# Altium PCB evacc_v3_1.PcbDoc (part 2 of 5)
Units mm, origin at the board's own origin, x right, y up, seen from the top; angles counter-clockwise.
Board outline 160 x 215 mm, 2 copper layers (Top Layer, Bottom Layer), stack 1.671 mm thick; 227 components, 143 nets, 622 pads, 320 vias.
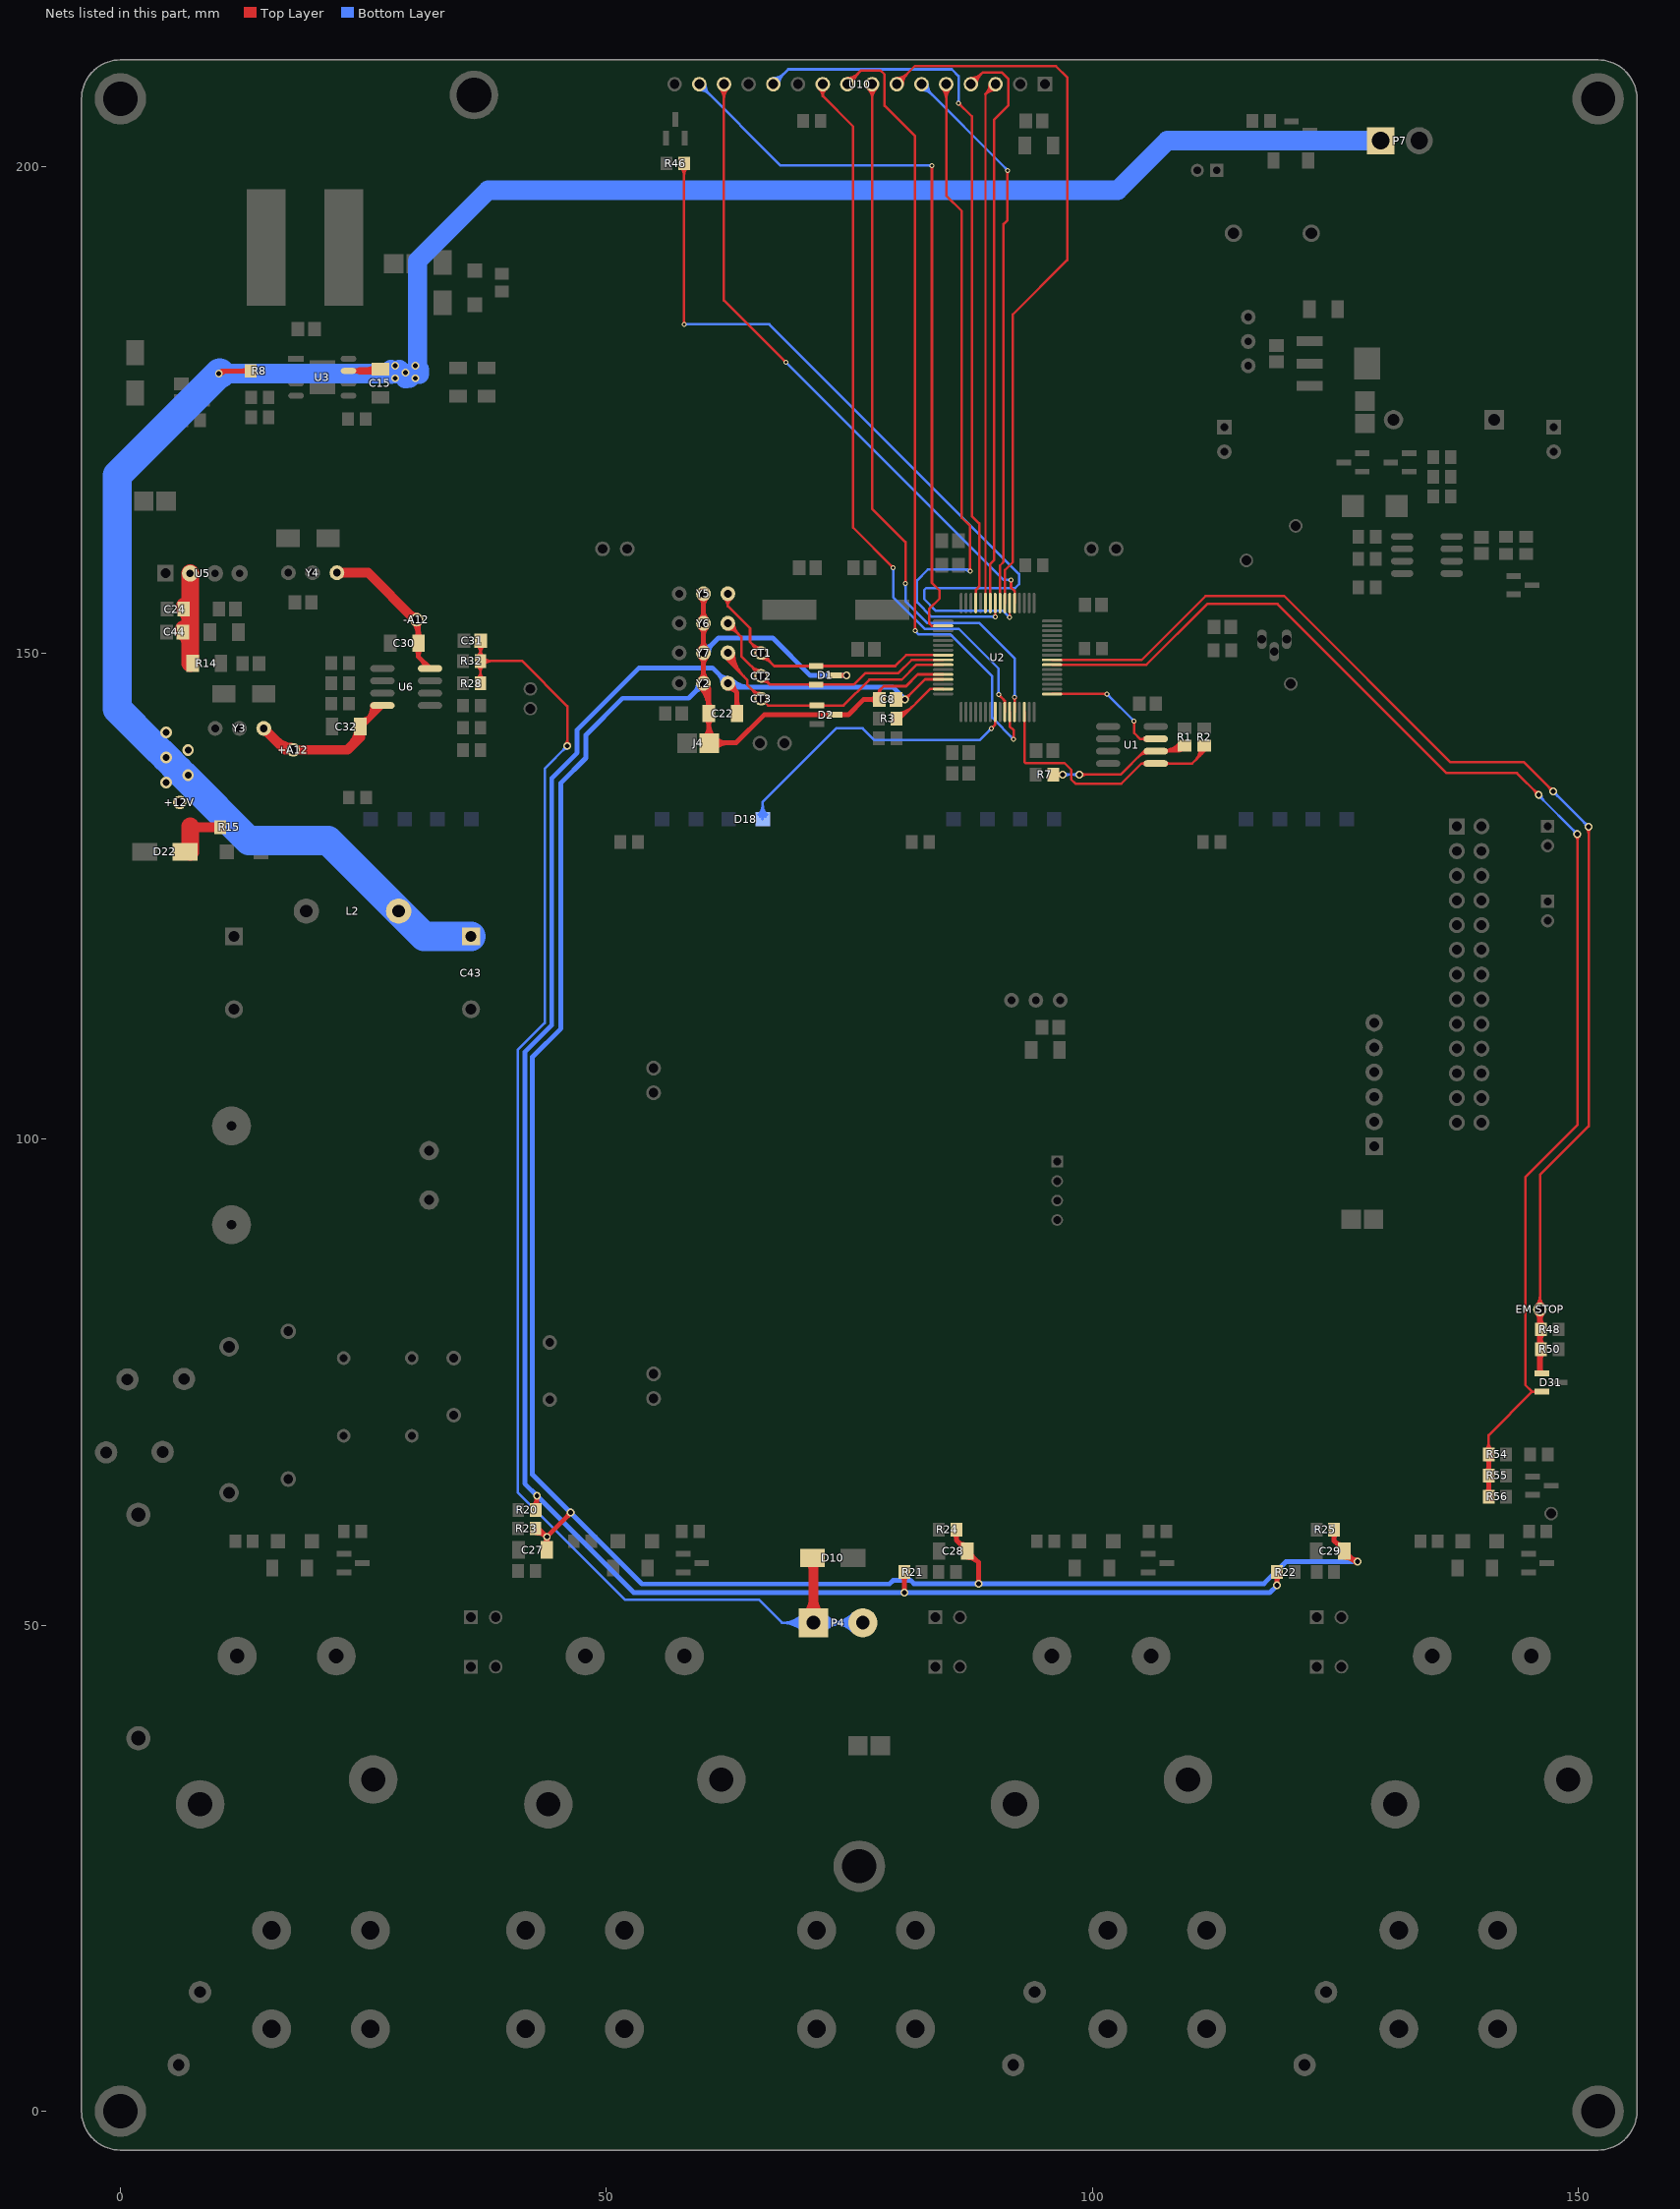
[diagram p2: the nets of this part, all layers, seen from the top]

## Via types
v1: diameter 0.8, hole 0.5, Top Layer to Bottom Layer, 150 vias
v2: diameter 0.8, hole 0.6, Top Layer to Bottom Layer, 80 vias
v3: diameter 0.5, hole 0.3, Top Layer to Bottom Layer, 53 vias
v4: diameter 1.27, hole 0.711, Top Layer to Bottom Layer, 20 vias
v5: diameter 1.2, hole 0.7, Top Layer to Bottom Layer, 13 vias
v6: diameter 1.2, hole 0.8, Top Layer to Bottom Layer, 4 vias

## Nets (pads, with @x,y where several pads share a name; then routed paths per layer and width w, separated by ;. In a path a pad name is that pad's centre, name@x,y a point inside that pad or via, vN(x,y) a via of type N, cw(c..) or ccw(c..) an arc to the next point about the centre after c; other vN are vias at no path point) (continued)
+12V: +12V.1 C15.1 C24.1 C43.1 C44.2 D22.2 L2.2 P7.1 R8.2 R14.1 R15.1 U3.7 U5.2 | length 287.7
  Top Layer w0.5: v1(10.135,178.74) 10.402,179.007 R8.2@13.388,179.007 ; 12.543,179.007 cw(c12.543,178.162) 13.14,178.759 ccw(c12.543,178.162) 12.543,179.007 ; 12.543,179.007 ccw(c12.543,179.852) 13.14,179.254 cw(c12.543,179.852) 12.543,179.007 ; v1@10.241,178.634 cw(c11.142,177.733) 11.142,179.007 ccw(c11.142,177.733) v1@10.241,178.634
  Top Layer w0.6: U3.7@23.465,179.014 24.633,179.014
  Top Layer w0.8: 24.633,179.014 26.561,179.014 C15.1@26.734,179.187 ; 25.463,179.014 ccw(c25.463,180.208) 26.307,179.364 cw(c25.463,180.208) 25.463,179.014
  Top Layer w1: 7.176,132.182 7.278,132.08 R15.1@10.276,132.08
  Top Layer w1.8: D22.2@7.176,129.515 7.176,129.54 7.176,132.182 ; R14.1@7.176,148.92 7.176,152.146 7.176,154.51 U5.2@7.176,158.193 ; C44.2@6.536,152.376 cw(c6.124,151.408) 7.176,151.408 ccw(c6.124,151.408) C44.2@6.536,152.376 ; C44.2@6.538,152.475 cw(c6.114,151.501) 7.176,151.501 ccw(c6.114,151.501) C44.2@6.538,152.475 ; C24.1@6.61,154.735 cw(c6.178,153.836) 7.176,153.836 ccw(c6.178,153.836) C24.1@6.61,154.735 ; C24.1@6.612,154.834 cw(c6.167,153.929) 7.176,153.929 ccw(c6.167,153.929) C24.1@6.612,154.834 ; C44.2@6.615,152.069 ccw(c5.26,153.424) 7.176,153.424 cw(c5.26,153.424) C44.2@6.615,152.069 ; C44.2@6.615,152.223 cw(c5.26,150.868) 7.176,150.868 ccw(c5.26,150.868) C44.2@6.615,152.223 ; C24.1@6.679,154.433 ccw(c5.478,155.634) 7.176,155.634 cw(c5.478,155.634) C24.1@6.679,154.433 ; C24.1@6.679,154.587 cw(c5.478,153.386) 7.176,153.386 ccw(c5.478,153.386) C24.1@6.679,154.587
  Bottom Layer w2: v1@10.296,178.731 28.27,178.731 29.312,178.731 29.972,178.731 30.558,179.317 30.558,179.553 30.558,190.315 37.829,197.587 37.922,197.587 102.591,197.587 107.696,202.692 P7.1@129.644,202.692 ; 27.846,179.128 ccw(c28.805,180.088) 28.805,178.731 ; 27.846,179.128 ccw(c28.805,180.088) 28.805,178.731 ; 27.846,179.128 ccw(c28.805,180.088) 28.805,178.731 ; 27.846,179.128 ccw(c28.805,180.088) 28.805,178.731 ; 27.846,179.128 ccw(c28.805,180.088) 28.805,178.731 ; 27.846,179.128 ccw(c28.805,180.088) 28.805,178.731 ; 29.312,178.216 ccw(c29.312,178.567) 29.56,178.319 ; 29.312,178.216 ccw(c29.312,178.567) 29.56,178.319 ; 29.312,178.216 ccw(c29.312,178.567) 29.56,178.319 ; 29.312,178.216 ccw(c29.312,178.567) 29.56,178.319 ; 29.818,178.731 ccw(c29.818,180.088) 30.777,179.128 ; 29.818,178.731 ccw(c29.818,180.088) 30.777,179.128 ; 29.818,178.731 ccw(c29.818,180.088) 30.777,179.128 ; 29.818,178.731 ccw(c29.818,180.088) 30.777,179.128 ; 29.818,178.731 ccw(c29.818,180.088) 30.777,179.128 ; 29.818,178.731 ccw(c29.818,180.088) 30.777,179.128 ; 27.735,178.731 ccw(c27.735,180.088) 28.694,179.128 cw(c27.735,180.088) 27.735,178.731 ; 27.846,178.681 cw(c27.965,178.562) 27.965,178.731 ccw(c27.965,178.562) 27.846,178.681 ; 28.575,178.731 cw(c28.575,178.562) 28.694,178.681 ccw(c28.575,178.562) 28.575,178.731 ; 29.753,178.257 cw(c30.368,178.257) 29.933,178.692 ccw(c30.368,178.257) 29.753,178.257 ; 30.658,178.731 cw(c30.658,178.562) 30.777,178.681 ccw(c30.658,178.562) 30.658,178.731
  Bottom Layer w3: v1@10.296,178.731 10.211,178.816 v1(10.135,178.74) -0.33,168.275 -0.33,144.247 3.404,140.513 4.686,139.23 5.969,137.947 6.718,137.198 13.208,130.708 21.362,130.708 L2.2@28.626,123.444 31.226,120.844 C43.1@36.068,120.844
  other v1: 28.27,178.257 30.353,178.257 29.312,178.816 28.27,179.553 30.353,179.553
  other v5: 4.699,136.677 6.96,137.439 4.699,139.243 6.96,140.005 4.699,141.808
+A3V3: C8.1 C22.1 R20.2 R21.2 R22.2 U2.13 Y2.3 | length 247.9
  Top Layer w0.254: R21.2@80.634,55.45 80.634,54.407 ; 80.645,54.396 80.634,54.407 ; 80.634,54.407 cw(c81.337,54.407) 80.917,54.971 ccw(c81.337,54.407) 80.634,54.407 ; 80.634,54.407 ccw(c79.931,54.407) 80.351,54.971 cw(c79.931,54.407) 80.634,54.407
  Top Layer w0.3: C8.1@79.781,145.225 v1(80.709,145.225) ; U2.13@84.634,147.282 82.766,147.282 v1(80.709,145.225) ; C8.1@80.105,145.225 cw(c80.105,144.621) 80.532,145.048 ccw(c80.105,144.621) C8.1@80.105,145.225 ; C8.1@80.105,145.225 ccw(c80.105,145.829) 80.532,145.402 cw(c80.105,145.829) C8.1@80.105,145.225 ; v1(80.709,145.225) cw(c80.709,145.836) 80.199,145.5 ccw(c80.709,145.836) v1(80.709,145.225) ; v1(80.709,145.225) ccw(c80.709,144.614) 80.199,144.95 cw(c80.709,144.614) v1(80.709,145.225) ; 81.136,145.652 cw(c80.709,146.079) 80.709,145.475 ccw(c80.709,146.079) 81.136,145.652 ; 81.136,145.652 ccw(c81.563,145.225) 80.959,145.225 cw(c81.563,145.225) 81.136,145.652
  Top Layer w0.5: R20.2@42.734,61.849 42.85,61.965 v1(42.85,63.297) ; Y2.3@62.483,146.876 63.426,145.933 C22.1@63.426,143.764 ; R21.2@80.634,55.45 80.645,55.439 80.645,54.396 v1(80.645,53.34) ; v1(118.988,54.091) R22.2@118.988,55.45 ; 63.357,146.002 cw(c64.231,146.876) 62.995,146.876 ccw(c64.231,146.876) 63.357,146.002 ; 63.357,146.002 ccw(c62.483,145.128) 62.483,146.364 cw(c62.483,145.128) 63.357,146.002 ; 63.426,144.98 cw(c62.46,144.98) 63.143,144.297 ccw(c62.46,144.98) 63.426,144.98 ; 63.426,144.98 ccw(c64.392,144.98) 63.709,144.297 cw(c64.392,144.98) 63.426,144.98 ; 118.988,54.505 cw(c119.833,54.505) 119.235,55.102 ccw(c119.833,54.505) 118.988,54.505 ; 118.988,54.505 ccw(c118.143,54.505) 118.74,55.102 cw(c118.143,54.505) 118.988,54.505 ; R20.2@42.486,62.196 ccw(c41.609,63.074) 42.85,63.074 cw(c41.609,63.074) R20.2@42.486,62.196 ; R21.2@80.386,55.102 cw(c79.762,54.478) 80.645,54.478 ccw(c79.762,54.478) R21.2@80.386,55.102 ; 80.645,54.532 cw(c81.452,54.532) 80.881,55.102 ccw(c81.452,54.532) 80.645,54.532
  Bottom Layer w0.5: v1@42.799,63.246 v1(42.85,63.297) ; v1(80.645,53.34) 52.807,53.34 v1(42.85,63.297) ; v1(80.709,145.225) 79.446,146.487 62.871,146.487 Y2.3@62.483,146.876 60.896,148.463 53.365,148.463 46.99,142.088 46.99,139.725 44.368,137.103 44.368,111.703 41.605,108.941 41.605,64.541 v1(42.85,63.297) ; v1@80.899,53.34 118.237,53.34 v1(118.988,54.091) ; 61.609,147.75 cw(c60.735,146.876) 61.971,146.876 ccw(c60.735,146.876) 61.609,147.75 ; 61.609,147.75 ccw(c62.483,148.624) 62.483,147.388 cw(c62.483,148.624) 61.609,147.75 ; Y2.3@62.491,146.884 ccw(c63.45,147.843) 63.45,146.487 cw(c63.45,147.843) Y2.3@62.491,146.884 ; Y2.3@62.845,147.238 ccw(c64.657,149.05) 64.657,146.487 cw(c64.657,149.05) Y2.3@62.845,147.238
+A12V: +A12.1 C32.2 U6.8 Y3.3 | length 30.9
  Top Layer w0.6: C32.2@24.666,142.418 24.779,142.418 U6.8@26.95,144.589 ; C32.2@24.666,143.018 ccw(c24.666,144.74) 25.883,143.522 cw(c24.666,144.74) C32.2@24.666,143.018 ; 25.328,142.967 ccw(c23.707,144.589) 26,144.589 cw(c23.707,144.589) 25.328,142.967 ; 26.353,143.992 ccw(c25.755,144.589) 26.6,144.589 cw(c25.755,144.589) 26.353,143.992
  Top Layer w1: Y3.3@14.743,142.24 16.953,140.03 +A12.1@17.78,140.03 23.368,140.03 24.666,141.328 C32.2@24.666,142.418 ; 16.026,140.957 ccw(c17.78,142.711) 17.78,140.23 cw(c17.78,142.711) 16.026,140.957 ; 23.816,140.478 ccw(c22.125,142.168) 24.516,142.168 cw(c22.125,142.168) 23.816,140.478
-A12V: -A12.1 C30.1 U6.4 Y4.1 | length 42.9
  Top Layer w0.254: C30.1@30.48,151.183 -A12.1@30.48,153.236 ; 30.48,152.033 cw(c31.863,152.033) 30.885,153.011 ccw(c31.863,152.033) 30.48,152.033 ; 30.48,152.033 ccw(c29.097,152.033) 30.075,153.011 cw(c29.097,152.033) 30.48,152.033 ; 30.48,152.646 cw(c31.25,152.646) 30.706,153.19 ccw(c31.25,152.646) 30.48,152.646 ; 30.48,152.646 ccw(c29.71,152.646) 30.254,153.19 cw(c29.71,152.646) 30.48,152.646 ; C30.1@30.29,151.623 ccw(c29.832,152.081) 30.48,152.081 cw(c29.832,152.081) C30.1@30.29,151.623 ; 30.48,152.337 ccw(c31.744,152.337) 30.85,151.443 cw(c31.744,152.337) 30.48,152.337 ; -A12.1@30.48,152.95 ccw(c32.357,152.95) 31.03,151.623 cw(c32.357,152.95) -A12.1@30.48,152.95
  Top Layer w0.5: Y4.1@22.272,158.242 Y4.1@22.606,158.242 ; C30.1@30.48,151.183 C30.1@30.66,151.003 ; -A12.1@30.48,153.236 30.66,153.236 C30.1@30.66,151.003 ; U6.4@31.85,148.399 30.66,149.589 C30.1@30.66,151.003 ; 30.66,149.787 cw(c31.626,149.787) 30.943,150.47 ccw(c31.626,149.787) 30.66,149.787 ; 30.66,149.787 ccw(c29.694,149.787) 30.377,150.47 cw(c29.694,149.787) 30.66,149.787 ; 30.66,152.219 cw(c29.694,152.219) 30.377,151.536 ccw(c29.694,152.219) 30.66,152.219 ; 30.66,152.219 ccw(c31.626,152.219) 30.943,151.536 cw(c31.626,152.219) 30.66,152.219 ; -A12.1@30.162,153.098 cw(c28.959,151.895) 30.66,151.895 ccw(c28.959,151.895) -A12.1@30.162,153.098 ; 31.018,149.231 cw(c30.215,148.428) 31.35,148.383 ccw(c30.215,148.428) 31.018,149.231 ; U6.4@31.826,148.423 cw(c31.769,148.367) 31.849,148.363 ccw(c31.769,148.367) U6.4@31.826,148.423
  Top Layer w1: Y4.1@22.606,158.242 25.474,158.242 30.3,153.416 -A12.1@30.48,153.416 ; 29.831,153.885 ccw(c30.48,154.533) 30.48,153.616 cw(c30.48,154.533) 29.831,153.885
/BLA: R46.1 U2.54 | length 92.2
  Top Layer w0.201: v3(91.484,153.646) U2.54@91.484,155.132 ; 91.484,154.007 cw(c91.123,154.007) 91.378,153.752 ccw(c91.123,154.007) 91.484,154.007 ; 91.484,154.007 ccw(c91.845,154.007) 91.59,153.752 cw(c91.845,154.007) 91.484,154.007
  Top Layer w0.254: v3(57.987,183.796) R46.1@57.987,200.357 ; 57.987,184.093 cw(c57.69,184.093) 57.9,183.883 ccw(c57.69,184.093) 57.987,184.093 ; 57.987,184.093 ccw(c58.284,184.093) 58.074,183.883 cw(c58.284,184.093) 57.987,184.093 ; 57.987,199.115 cw(c59.129,199.115) 58.321,199.923 ccw(c59.129,199.115) 57.987,199.115 ; 57.987,199.115 ccw(c56.845,199.115) 57.653,199.923 cw(c56.845,199.115) 57.987,199.115
  Bottom Layer w0.254: v3(57.987,183.796) 66.749,183.796 92.431,158.115 92.431,157.074 92.024,156.667 82.88,156.667 82.677,156.464 82.677,155.55 83.896,154.33 90.8,154.33 v3(91.484,153.646) ; 58.284,183.796 cw(c58.284,184.093) 58.074,183.883 ccw(c58.284,184.093) 58.284,183.796 ; 58.284,183.796 ccw(c58.284,183.499) 58.074,183.709 cw(c58.284,183.499) 58.284,183.796 ; 91.274,153.856 cw(c91.064,153.646) 91.361,153.646 ccw(c91.064,153.646) 91.274,153.856 ; 91.274,153.856 ccw(c91.484,154.066) 91.484,153.769 cw(c91.484,154.066) 91.274,153.856
/CS: U2.2 U10.15 | length 86.2
  Top Layer w0.254: v3(83.478,200.128) 83.478,157.213 84.265,156.425 84.265,155.588 83.185,154.508 83.185,153.049 83.452,152.782 U2.2@84.634,152.782 ; 83.478,199.831 cw(c83.775,199.831) 83.565,200.041 ccw(c83.775,199.831) 83.478,199.831 ; 83.478,199.831 ccw(c83.181,199.831) 83.391,200.041 cw(c83.181,199.831) 83.478,199.831
  Bottom Layer w0.254: U10.15@59.545,208.503 67.92,200.128 v3(83.478,200.128) ; 60.175,207.873 cw(c60.805,208.503) 59.914,208.503 ccw(c60.805,208.503) 60.175,207.873 ; 60.175,207.873 ccw(c59.545,207.243) 59.545,208.134 cw(c59.545,207.243) 60.175,207.873 ; 60.609,207.44 cw(c61.672,208.503) 60.168,208.503 ccw(c61.672,208.503) 60.609,207.44 ; 60.609,207.44 ccw(c59.545,206.376) 59.545,207.88 cw(c59.545,206.376) 60.609,207.44 ; 83.181,200.128 cw(c83.181,199.831) 83.391,200.041 ccw(c83.181,199.831) 83.181,200.128 ; 83.181,200.128 ccw(c83.181,200.425) 83.391,200.215 cw(c83.181,200.425) 83.181,200.128
/DEBUG: R3.1 U2.15 | length 14.6
  Top Layer w0.254: R3.1@79.831,143.256 80.264,143.256 83.29,146.282 U2.15@84.634,146.282 ; R3.1@79.831,143.321 ccw(c79.831,144.523) 80.681,143.673 cw(c79.831,144.523) R3.1@79.831,143.321 ; R3.1@79.831,143.575 ccw(c79.831,145.391) 81.115,144.107 cw(c79.831,145.391) R3.1@79.831,143.575 ; R3.1@79.831,143.829 ccw(c79.831,146.258) 81.548,144.54 cw(c79.831,146.258) R3.1@79.831,143.829
/EM_STOP: "EM STOP.1" D31.1 R48.1 R50.1 U2.40 | length 165.4
  Top Layer w0.254: U2.40@95.851,149.265 U2.40@95.834,149.282 105.061,149.282 111.633,155.854 119.71,155.854 136.779,138.786 144.348,138.786 v1(147.371,135.763) ; R48.1@146.025,80.532 R48.1@146.141,80.416 ; R48.1@146.025,80.596 146.141,80.596 R48.1@146.141,80.416 ; 146.025,82.474 146.025,96.317 151.028,101.321 v1(151.028,132.105) ; D31.1@146.139,75.905 D31.1@146.139,75.984 ; R50.1@146.141,78.384 146.141,79.656 ; R48.1@145.988,79.869 cw(c145.916,79.656) 146.141,79.656 ; R48.1@145.988,79.869 cw(c145.916,79.656) 146.141,79.656 ; R48.1@145.988,79.869 cw(c145.916,79.656) 146.141,79.656 ; R48.1@145.988,79.869 cw(c145.916,79.656) 146.141,79.656 ; R48.1@145.988,79.869 cw(c145.916,79.656) 146.141,79.656 ; R48.1@145.988,79.869 cw(c145.916,79.656) 146.141,79.656 ; 146.025,83.244 cw(c145.254,83.244) 145.799,82.699 ccw(c145.254,83.244) 146.025,83.244 ; 146.025,83.244 ccw(c146.795,83.244) 146.25,82.699 cw(c146.795,83.244) 146.025,83.244 ; 146.025,83.857 cw(c144.641,83.857) 145.619,82.879 ccw(c144.641,83.857) 146.025,83.857 ; 146.025,83.857 ccw(c147.408,83.857) 146.43,82.879 cw(c147.408,83.857) 146.025,83.857 ; 146.141,79.175 cw(c147.282,79.175) 146.475,79.982 ccw(c147.282,79.175) 146.141,79.175 ; 146.141,79.174 ccw(c144.999,79.174) 145.806,79.982 cw(c144.999,79.174) 146.141,79.174 ; 146.141,79.626 cw(c144.999,79.626) 145.806,78.819 ccw(c144.999,79.626) 146.141,79.626 ; 146.141,79.626 ccw(c147.283,79.626) 146.475,78.819 cw(c147.283,79.626) 146.141,79.626 ; 146.141,79.656 cw(c146.365,79.656) R48.1@146.293,79.869 ; 146.141,79.656 cw(c146.365,79.656) R48.1@146.293,79.869 ; 146.141,79.656 cw(c146.365,79.656) R48.1@146.293,79.869 ; 146.141,79.656 cw(c146.365,79.656) R48.1@146.293,79.869 ; 146.141,79.656 cw(c146.365,79.656) R48.1@146.293,79.869 ; 146.141,79.656 cw(c146.365,79.656) R48.1@146.293,79.869 ; 146.141,79.656 R48.1@146.141,80.416 ; 146.905,136.229 cw(c146.439,135.763) 147.098,135.763 ccw(c146.439,135.763) 146.905,136.229 ; 146.905,136.229 ccw(c147.371,136.695) 147.371,136.036 cw(c147.371,136.695) 146.905,136.229 ; 151.028,131.446 cw(c151.687,131.446) 151.221,131.912 ccw(c151.687,131.446) 151.028,131.446 ; 151.028,131.446 ccw(c150.369,131.446) 150.835,131.912 cw(c150.369,131.446) 151.028,131.446
  Top Layer w0.6: 146.025,82.474 146.025,80.596 146.025,80.532 146.025,80.416 146.025,78.384 146.025,76.098 146.139,75.984 D31.1@146.218,75.905 ; 146.025,81.508 cw(c146.99,81.508) 146.307,82.191 ccw(c146.99,81.508) 146.025,81.508 ; 146.025,81.508 ccw(c145.059,81.508) 145.742,82.191 cw(c145.059,81.508) 146.025,81.508 ; D31.1@146.218,75.905 cw(c146.684,76.371) 146.025,76.371 ccw(c146.684,76.371) D31.1@146.218,75.905 ; 146.025,77.28 cw(c147.145,77.28) 146.353,78.072 ccw(c147.145,77.28) 146.025,77.28 ; 146.025,79.312 cw(c147.145,79.312) 146.353,80.104 ccw(c147.145,79.312) 146.025,79.312 ; 146.025,79.489 ccw(c147.145,79.489) 146.353,78.697 cw(c147.145,79.489) 146.025,79.489 ; 146.025,81.521 ccw(c147.145,81.521) 146.353,80.729 cw(c147.145,81.521) 146.025,81.521
  Bottom Layer w0.254: v1(147.371,135.763) v1(151.028,132.105) ; 147.837,135.297 cw(c148.303,135.763) 147.644,135.763 ccw(c148.303,135.763) 147.837,135.297 ; 147.837,135.297 ccw(c147.371,134.831) 147.371,135.49 cw(c147.371,134.831) 147.837,135.297 ; 150.562,132.571 cw(c150.096,132.105) 150.755,132.105 ccw(c150.096,132.105) 150.562,132.571 ; 150.562,132.571 ccw(c151.028,133.037) 151.028,132.378 cw(c151.028,133.037) 150.562,132.571
/RELAYON: D31.2 R54.1 R55.1 R56.1 U2.39 | length 163.8
  Top Layer w0.254: U2.39@95.834,148.782 105.551,148.782 111.811,155.042 119.039,155.042 136.437,137.644 143.661,137.644 v1(145.898,135.407) ; R54.1@140.749,67.564 140.749,69.53 145.225,74.005 ; D31.2@146.218,74.005 145.225,74.005 ; v1(149.885,131.343) 149.885,101.436 144.526,96.077 144.526,74.704 145.225,74.005 ; 140.749,68.806 cw(c139.607,68.806) 140.415,67.998 ccw(c139.607,68.806) 140.749,68.806 ; 140.749,68.806 ccw(c141.891,68.806) 141.084,67.998 cw(c141.891,68.806) 140.749,68.806 ; 145.35,74.005 cw(c145.35,73.588) 145.645,73.883 ccw(c145.35,73.588) 145.35,74.005 ; 145.35,74.005 ccw(c145.35,74.423) 145.645,74.128 cw(c145.35,74.423) 145.35,74.005 ; 145.432,135.873 cw(c144.966,135.407) 145.625,135.407 ccw(c144.966,135.407) 145.432,135.873 ; 145.432,135.873 ccw(c145.898,136.339) 145.898,135.68 cw(c145.898,136.339) 145.432,135.873 ; 149.885,130.684 cw(c150.544,130.684) 150.078,131.15 ccw(c150.544,130.684) 149.885,130.684 ; 149.885,130.684 ccw(c149.226,130.684) 149.692,131.15 cw(c149.226,130.684) 149.885,130.684
  Top Layer w0.5: R56.1@140.749,63.213 R55.1@140.749,65.389 R54.1@140.749,67.564 ; 140.749,64.158 cw(c139.904,64.158) 140.502,63.561 ccw(c139.904,64.158) 140.749,64.158 ; 140.749,64.158 ccw(c141.594,64.158) 140.997,63.561 cw(c141.594,64.158) 140.749,64.158 ; 140.749,64.444 cw(c141.594,64.444) 140.997,65.041 ccw(c141.594,64.444) 140.749,64.444 ; 140.749,64.444 ccw(c139.904,64.444) 140.502,65.041 cw(c139.904,64.444) 140.749,64.444 ; 140.749,66.334 cw(c139.904,66.334) 140.502,65.736 ccw(c139.904,66.334) 140.749,66.334 ; 140.749,66.334 ccw(c141.594,66.334) 140.997,65.736 cw(c141.594,66.334) 140.749,66.334 ; 140.749,66.619 cw(c141.594,66.619) 140.997,67.217 ccw(c141.594,66.619) 140.749,66.619 ; 140.749,66.619 ccw(c139.904,66.619) 140.502,67.217 cw(c139.904,66.619) 140.749,66.619
  Bottom Layer w0.254: v1(145.898,135.407) 145.898,135.331 v1(149.885,131.343) ; 149.419,131.809 cw(c148.953,131.343) 149.612,131.343 ccw(c148.953,131.343) 149.419,131.809 ; 149.419,131.809 ccw(c149.885,132.275) 149.885,131.616 cw(c149.885,132.275) 149.419,131.809 ; v1@145.898,135.134 cw(c145.898,134.659) 146.234,134.995 ccw(c145.898,134.659) v1@145.898,135.134 ; v1@146.171,135.407 ccw(c147.014,135.407) 146.418,134.811 cw(c147.014,135.407) v1@146.171,135.407
/RES: U2.53 U10.14 | length 77.5
  Top Layer w0.254: U10.14@62.085,208.503 62.085,186.266 v3(68.441,179.91) ; v3(91.618,157.505) 91.618,156.733 91.984,156.367 U2.53@91.984,155.132 ; 62.085,206.999 cw(c63.589,206.999) 62.526,208.063 ccw(c63.589,206.999) 62.085,206.999 ; 62.085,206.999 ccw(c60.581,206.999) 61.644,208.063 cw(c60.581,206.999) 62.085,206.999 ; 62.085,207.612 cw(c62.976,207.612) 62.346,208.242 ccw(c62.976,207.612) 62.085,207.612 ; 62.085,207.612 ccw(c61.194,207.612) 61.824,208.242 cw(c61.194,207.612) 62.085,207.612 ; 68.231,180.12 cw(c68.021,179.91) 68.318,179.91 ccw(c68.021,179.91) 68.231,180.12 ; 68.231,180.12 ccw(c68.441,180.33) 68.441,180.033 cw(c68.441,180.33) 68.231,180.12 ; 91.618,157.208 cw(c91.915,157.208) 91.705,157.418 ccw(c91.915,157.208) 91.618,157.208 ; 91.618,157.208 ccw(c91.321,157.208) 91.531,157.418 cw(c91.321,157.208) 91.618,157.208
  Bottom Layer w0.254: v3(68.441,179.91) 90.845,157.505 v3(91.618,157.505) ; 68.651,179.7 cw(c68.861,179.91) 68.564,179.91 ccw(c68.861,179.91) 68.651,179.7 ; 68.651,179.7 ccw(c68.441,179.49) 68.441,179.787 cw(c68.441,179.49) 68.651,179.7 ; 91.321,157.505 cw(c91.321,157.208) 91.531,157.418 ccw(c91.321,157.208) 91.321,157.505 ; 91.321,157.505 ccw(c91.321,157.802) 91.531,157.592 cw(c91.321,157.802) 91.321,157.505
/WR: U2.61 U10.12 | length 84.6
  Top Layer w0.254: v3(86.221,206.555) 87.574,205.201 87.574,164.089 88.341,163.322 88.341,156.843 88.007,156.509 88.007,155.155 U2.61@87.984,155.132 ; 86.431,206.345 cw(c86.641,206.555) 86.344,206.555 ccw(c86.641,206.555) 86.431,206.345 ; 86.431,206.345 ccw(c86.221,206.135) 86.221,206.432 cw(c86.221,206.135) 86.431,206.345
  Bottom Layer w0.254: U10.12@67.165,208.503 68.695,210.033 85.522,210.033 86.221,209.334 v3(86.221,206.555) ; 67.795,209.133 cw(c67.165,209.763) 67.165,208.872 ccw(c67.165,209.763) 67.795,209.133 ; 67.795,209.133 ccw(c68.425,208.503) 67.534,208.503 cw(c68.425,208.503) 67.795,209.133 ; 68.229,209.567 cw(c67.165,210.63) 67.165,209.126 ccw(c67.165,210.63) 68.229,209.567 ; 68.229,209.567 ccw(c69.292,208.503) 67.788,208.503 cw(c69.292,208.503) 68.229,209.567 ; 86.221,206.852 cw(c85.924,206.852) 86.134,206.642 ccw(c85.924,206.852) 86.221,206.852 ; 86.221,206.852 ccw(c86.518,206.852) 86.308,206.642 cw(c86.518,206.852) 86.221,206.852
AGND: C8.2 C22.2 C27.1 C28.1 C29.1 D1.3 D2.3 J4.2 R23.1 R24.1 R25.1 U2.12 Y2.2 Y5.2 Y6.2 Y7.2 | length 341.5
  Top Layer w0.3: C8.2@78.081,145.225 78.081,146.153 ; U2.12@84.634,147.782 82.021,147.782 80.823,146.583 78.511,146.583 78.081,146.153 ; 78.081,146.153 cw(c77.645,146.153) 77.848,145.767 ccw(c77.645,146.153) 78.081,146.153 ; 78.081,146.153 ccw(c78.517,146.153) 78.314,145.767 cw(c78.517,146.153) 78.081,146.153
  Top Layer w0.5: R23.1@42.706,59.944 43.002,59.944 43.856,59.09 43.856,59.08 C27.1@43.856,57.736 ; v1(43.866,59.08) 46.304,61.519 v1(46.304,61.595) ; Y5.2@59.983,156.096 Y6.2@59.983,153.048 Y7.2@59.983,150 Y2.2@59.983,146.876 60.526,146.333 C22.2@60.526,143.764 60.526,140.776 J4.2@60.586,140.716 60.646,140.776 63.357,140.776 66.218,143.637 D2.3@73.533,143.637 74.879,143.637 76.467,145.225 C8.2@78.081,145.225 ; J4.2@60.056,141.246 ccw(c58.92,142.382) 60.526,142.382 ; 60.526,142.672 ccw(c62.542,142.672) 61.116,141.246 ccw(c62.252,142.382) 62.252,140.776 ; J4.2@61.116,140.186 cw(c62.542,138.761) 62.542,140.776 ; D1.3@73.467,147.701 73.492,147.676 v1(74.701,147.676) ; R24.1@85.99,59.817 85.99,58.731 C28.1@87.112,57.609 88.265,56.456 v1(88.265,54.268) ; R25.1@124.852,59.817 124.852,58.667 C29.1@125.91,57.609 127.004,56.515 v1(127.254,56.515) ; v1@43.856,58.952 cw(c42.89,58.952) 43.573,58.269 ccw(c42.89,58.952) v1@43.856,58.952 ; v1@43.856,58.952 ccw(c44.821,58.952) 44.139,58.269 cw(c44.821,58.952) v1@43.856,58.952 ; 59.983,148.112 cw(c58.747,148.112) 59.621,147.238 ccw(c58.747,148.112) 59.983,148.112 ; 59.983,148.112 ccw(c61.219,148.112) 60.345,147.238 cw(c61.219,148.112) 59.983,148.112 ; 59.983,148.764 cw(c61.219,148.764) 60.345,149.638 ccw(c61.219,148.764) 59.983,148.764 ; 59.983,148.764 ccw(c58.747,148.764) 59.621,149.638 cw(c58.747,148.764) 59.983,148.764 ; 59.983,151.236 cw(c58.747,151.236) 59.621,150.362 ccw(c58.747,151.236) 59.983,151.236 ; 59.983,151.236 ccw(c61.219,151.236) 60.345,150.362 cw(c61.219,151.236) 59.983,151.236 ; 59.983,151.812 cw(c61.219,151.812) 60.345,152.686 ccw(c61.219,151.812) 59.983,151.812 ; 59.983,151.812 ccw(c58.747,151.812) 59.621,152.686 cw(c58.747,151.812) 59.983,151.812 ; 59.983,154.284 cw(c58.747,154.284) 59.621,153.41 ccw(c58.747,154.284) 59.983,154.284 ; 59.983,154.284 ccw(c61.219,154.284) 60.345,153.41 cw(c61.219,154.284) 59.983,154.284 ; 59.983,154.86 cw(c61.219,154.86) 60.345,155.734 ccw(c61.219,154.86) 59.983,154.86 ; 59.983,154.86 ccw(c58.747,154.86) 59.621,155.734 cw(c58.747,154.86) 59.983,154.86 ; 60.526,142.548 cw(c61.492,142.548) 60.809,143.231 ccw(c61.492,142.548) 60.526,142.548 ; 60.526,142.548 ccw(c59.56,142.548) 60.243,143.231 cw(c59.56,142.548) 60.526,142.548 ; 60.526,144.98 cw(c59.56,144.98) 60.243,144.297 ccw(c59.56,144.98) 60.526,144.98 ; 60.526,144.98 ccw(c61.492,144.98) 60.809,144.297 cw(c61.492,144.98) 60.526,144.98 ; 77.115,145.225 cw(c77.115,144.259) 77.798,144.942 ccw(c77.115,144.259) 77.115,145.225 ; 77.115,145.225 ccw(c77.115,146.191) 77.798,145.508 cw(c77.115,146.191) 77.115,145.225 ; 85.99,58.872 cw(c86.835,58.872) 86.237,59.47 ccw(c86.835,58.872) 85.99,58.872 ; 85.99,58.872 ccw(c85.145,58.872) 85.742,59.47 cw(c85.145,58.872) 85.99,58.872 ; 124.852,58.872 cw(c125.697,58.872) 125.1,59.47 ccw(c125.697,58.872) 124.852,58.872 ; 124.852,58.872 ccw(c124.007,58.872) 124.605,59.47 cw(c124.007,58.872) 124.852,58.872 ; R23.1@42.706,59.494 cw(c42.706,57.692) 43.98,58.966 ccw(c42.706,57.692) R23.1@42.706,59.494 ; 45.994,61.209 ccw(c45.608,61.595) 46.154,61.595 cw(c45.608,61.595) 45.994,61.209 ; Y2.2@59.621,146.514 cw(c57.435,144.328) 60.526,144.328 ccw(c57.435,144.328) Y2.2@59.621,146.514 ; Y2.2@59.974,146.867 cw(c58.642,145.535) 60.526,145.535 ccw(c58.642,145.535) Y2.2@59.974,146.867 ; 86.115,58.606 ccw(c86.968,59.459) 87.076,58.257 cw(c86.968,59.459) 86.115,58.606 ; C28.1@87.112,56.959 cw(c87.112,55.39) 88.222,56.499 ccw(c87.112,55.39) C28.1@87.112,56.959 ; 124.977,58.542 ccw(c125.698,59.263) 125.85,58.255 cw(c125.698,59.263) 124.977,58.542 ; C29.1@125.91,56.959 cw(c125.91,55.39) 127.02,56.499 ccw(c125.91,55.39) C29.1@125.91,56.959 ; 126.571,56.948 ccw(c127.254,57.631) 127.254,56.665 cw(c127.254,57.631) 126.571,56.948
  Bottom Layer w0.5: Y2.2@59.983,146.876 58.445,145.339 51.664,145.339 47.879,141.554 47.879,139.192 45.314,136.627 45.314,111.379 42.393,108.458 42.393,65.481 53.645,54.229 79.121,54.229 79.502,54.61 81.28,54.61 81.622,54.268 v1(88.265,54.268) 117.641,54.268 119.888,56.515 v1(127.254,56.515) ; Y7.2@59.983,150 61.519,151.536 67.107,151.536 70.968,147.676 v1(74.701,147.676) ; 59.109,146.002 cw(c59.983,145.128) 59.983,146.364 ccw(c59.983,145.128) 59.109,146.002 ; 59.109,146.002 ccw(c58.235,146.876) 59.471,146.876 cw(c58.235,146.876) 59.109,146.002 ; 60.857,150.874 cw(c59.983,151.748) 59.983,150.512 ccw(c59.983,151.748) 60.857,150.874 ; 60.857,150.874 ccw(c61.731,150) 60.495,150 cw(c61.731,150) 60.857,150.874 ; 46.005,61.869 ccw(c46.304,62.168) 46.304,61.745 cw(c46.304,62.168) 46.005,61.869 ; v1@46.454,61.595 ccw(c46.878,61.595) 46.578,61.296 cw(c46.878,61.595) v1@46.454,61.595
CHARGE: D18.2 U2.24 | length 40.7
  Top Layer w0.254: v3(89.599,142.242) 89.984,142.627 U2.24@89.984,143.932 ; 89.809,142.452 cw(c89.599,142.662) 89.599,142.365 ccw(c89.599,142.662) 89.809,142.452 ; 89.809,142.452 ccw(c90.019,142.242) 89.722,142.242 cw(c90.019,142.242) 89.809,142.452
  Bottom Layer w0.254: D18.2@66.076,132.906 66.076,134.681 73.635,142.24 76.352,142.24 77.57,141.023 88.38,141.023 v3(89.599,142.242) ; 66.076,133.797 cw(c65.185,133.797) 65.815,133.167 ccw(c65.185,133.797) 66.076,133.797 ; 66.076,133.797 ccw(c66.967,133.797) 66.337,133.167 cw(c66.967,133.797) 66.076,133.797 ; 66.076,134.41 cw(c64.572,134.41) 65.635,133.346 ccw(c64.572,134.41) 66.076,134.41 ; 66.076,134.41 ccw(c67.58,134.41) 66.517,133.346 cw(c67.58,134.41) 66.076,134.41 ; 89.389,142.032 cw(c89.599,141.822) 89.599,142.119 ccw(c89.599,141.822) 89.389,142.032 ; 89.389,142.032 ccw(c89.179,142.242) 89.476,142.242 cw(c89.179,142.242) 89.389,142.032
CP: C31.2 D10.2 P4.1 P4.2 R28.2 R32.2 | length 254.8
  Top Layer w0.254: R28.2@37.031,146.875 R32.2@37.031,149.161 ; C31.2@37.045,151.257 37.031,151.243 R32.2@37.031,149.161 ; v1(45.974,140.437) 45.974,144.526 41.339,149.161 R32.2@37.031,149.161 ; 37.031,147.919 cw(c38.173,147.919) 37.365,148.727 ccw(c38.173,147.919) 37.031,147.919 ; 37.031,147.919 ccw(c35.889,147.919) 36.697,148.727 cw(c35.889,147.919) 37.031,147.919 ; 37.031,148.117 cw(c35.889,148.117) 36.697,147.31 ccw(c35.889,148.117) 37.031,148.117 ; 37.031,148.117 ccw(c38.173,148.117) 37.365,147.31 cw(c38.173,148.117) 37.031,148.117 ; 37.031,150.403 cw(c35.889,150.403) 36.697,149.596 ccw(c35.889,150.403) 37.031,150.403 ; 37.031,150.403 ccw(c38.173,150.403) 37.365,149.596 cw(c38.173,150.403) 37.031,150.403 ; 38.173,149.161 cw(c38.173,150.303) 37.365,149.496 ccw(c38.173,150.303) 38.173,149.161 ; 38.173,149.161 ccw(c38.173,148.019) 37.365,148.827 cw(c38.173,148.019) 38.173,149.161 ; 45.974,141.096 cw(c45.315,141.096) 45.781,140.63 ccw(c45.315,141.096) 45.974,141.096 ; 45.974,141.096 ccw(c46.633,141.096) 46.167,140.63 cw(c46.633,141.096) 45.974,141.096 ; C31.2@36.675,150.787 cw(c35.816,149.928) 37.031,149.928 ccw(c35.816,149.928) C31.2@36.675,150.787 ; R32.2@37.031,149.861 cw(c38.341,149.861) 37.415,150.787 ccw(c38.341,149.861) R32.2@37.031,149.861 ; 37.031,150.474 cw(c37.728,150.474) 37.235,150.967 ccw(c37.728,150.474) 37.031,150.474
  Top Layer w1: D10.2@71.159,56.941 D10.2@71.204,56.896 71.291,56.809 P4.1@71.291,50.243 ; 71.291,52.657 cw(c68.877,52.657) 70.584,50.95 ccw(c68.877,52.657) 71.291,52.657 ; 71.291,52.657 ccw(c73.705,52.657) 71.998,50.95 cw(c73.705,52.657) 71.291,52.657 ; D10.2@70.904,56.595 cw(c69.968,55.66) 71.291,55.66 ccw(c69.968,55.66) D10.2@70.904,56.595
  Bottom Layer w0.254: v1(45.974,140.437) 43.636,138.099 43.636,111.937 40.894,109.195 40.894,63.627 51.892,52.629 65.661,52.629 68.047,50.243 ; P4.2@76.371,50.243 P4.1@71.291,50.243 68.047,50.243 ; 45.508,139.971 cw(c45.974,139.505) 45.974,140.164 ccw(c45.974,139.505) 45.508,139.971 ; 45.508,139.971 ccw(c45.042,140.437) 45.701,140.437 cw(c45.042,140.437) 45.508,139.971 ; 68.047,50.243 cw(c68.047,47.096) 70.306,49.287 ccw(c68.047,47.096) 68.047,50.243 ; 68.047,50.243 ccw(c68.047,53.39) 70.306,51.199 cw(c68.047,53.39) 68.047,50.243 ; 68.647,50.243 cw(c68.647,47.678) 70.488,49.464 ccw(c68.647,47.678) 68.647,50.243 ; 68.647,50.243 ccw(c68.647,52.807) 70.488,51.022 cw(c68.647,52.807) 68.647,50.243 ; 69.247,50.243 cw(c69.247,48.261) 70.67,49.641 ccw(c69.247,48.261) 69.247,50.243 ; 69.247,50.243 ccw(c69.247,52.225) 70.67,50.845 cw(c69.247,52.225) 69.247,50.243 ; 73.056,50.243 cw(c73.056,46.928) 75.4,49.272 ccw(c73.056,46.928) 73.056,50.243 ; 73.056,50.243 ccw(c73.056,53.558) 75.4,51.214 cw(c73.056,53.558) 73.056,50.243 ; 73.379,50.243 cw(c73.379,52.331) 71.903,50.855 ccw(c73.379,52.331) 73.379,50.243 ; 73.379,50.243 ccw(c73.379,48.155) 71.903,49.631 cw(c73.379,48.155) 73.379,50.243 ; 73.67,50.243 cw(c73.67,47.541) 75.58,49.452 ccw(c73.67,47.541) 73.67,50.243 ; 73.67,50.243 ccw(c73.67,52.944) 75.58,51.034 cw(c73.67,52.944) 73.67,50.243 ; 73.993,50.243 cw(c73.993,52.944) 72.082,51.034 ccw(c73.993,52.944) 73.993,50.243 ; 73.993,50.243 ccw(c73.993,47.541) 72.082,49.452 cw(c73.993,47.541) 73.993,50.243 ; 74.283,50.243 cw(c74.283,48.155) 75.759,49.631 ccw(c74.283,48.155) 74.283,50.243 ; 74.283,50.243 ccw(c74.283,52.331) 75.759,50.855 cw(c74.283,52.331) 74.283,50.243 ; 74.606,50.243 cw(c74.606,53.558) 72.262,51.214 ccw(c74.606,53.558) 74.606,50.243 ; 74.606,50.243 ccw(c74.606,46.928) 72.262,49.272 cw(c74.606,46.928) 74.606,50.243
CT1: CT1.1 D1.1 U2.8 Y5.3 | length 49.2
  Top Layer w0.254: Y5.3@62.483,156.096 62.483,154.814 ; U2.8@84.634,149.782 80.821,149.782 79.69,148.651 D1.1@71.567,148.651 67.249,148.651 CT1.1@65.913,149.987 64.77,151.13 64.77,152.527 62.483,154.814 ; 62.483,154.814 cw(c63.459,154.814) 62.867,155.591 ccw(c63.459,154.814) 62.483,154.814 ; 62.483,154.814 ccw(c61.507,154.814) 62.098,155.591 cw(c61.507,154.814) 62.483,154.814 ; 62.483,155.327 cw(c63.068,155.327) 62.713,155.793 ccw(c63.068,155.327) 62.483,155.327 ; 62.483,155.327 ccw(c61.897,155.327) 62.252,155.793 cw(c61.897,155.327) 62.483,155.327 ; 64.935,150.965 cw(c63.957,149.987) 65.34,149.987 ccw(c63.957,149.987) 64.935,150.965 ; 64.935,150.965 ccw(c65.913,151.943) 65.913,150.56 cw(c65.913,151.943) 64.935,150.965 ; 65.368,150.531 cw(c64.824,149.987) 65.594,149.987 ccw(c64.824,149.987) 65.368,150.531 ; 65.368,150.531 ccw(c65.913,151.076) 65.913,150.306 cw(c65.913,151.076) 65.368,150.531 ; 66.458,149.442 cw(c67.002,149.987) 66.232,149.987 ccw(c67.002,149.987) 66.458,149.442 ; 66.458,149.442 ccw(c65.913,148.898) 65.913,149.668 cw(c65.913,148.898) 66.458,149.442 ; 66.891,149.009 cw(c67.869,149.987) 66.486,149.987 ccw(c67.869,149.987) 66.891,149.009 ; 66.891,149.009 ccw(c65.913,148.031) 65.913,149.414 cw(c65.913,148.031) 66.891,149.009 ; 70.699,148.651 cw(c70.699,148.233) 70.995,148.529 ccw(c70.699,148.233) 70.699,148.651 ; 70.699,148.651 ccw(c70.699,149.069) 70.995,148.773 cw(c70.699,149.069) 70.699,148.651 ; 72.435,148.651 cw(c72.435,149.069) 72.139,148.773 ccw(c72.435,149.069) 72.435,148.651 ; 72.435,148.651 ccw(c72.435,148.233) 72.139,148.529 cw(c72.435,148.233) 72.435,148.651
CT2: CT2.1 D1.2 U2.9 Y6.3 | length 47.8
  Top Layer w0.254: Y6.3@62.483,153.048 63.881,151.65 63.881,149.669 CT2.1@65.913,147.637 66.799,146.751 ; U2.9@84.634,149.282 81.388,149.282 80.01,147.904 76.606,147.904 75.453,146.751 D1.2@71.567,146.751 66.799,146.751 ; 63.133,152.398 cw(c63.783,153.048) 62.864,153.048 ccw(c63.783,153.048) 63.133,152.398 ; 63.133,152.398 ccw(c62.483,151.747) 62.483,152.667 cw(c62.483,151.747) 63.133,152.398 ; 63.567,151.964 cw(c64.651,153.048) 63.118,153.048 ccw(c64.651,153.048) 63.567,151.964 ; 63.567,151.964 ccw(c62.483,150.88) 62.483,152.413 cw(c62.483,150.88) 63.567,151.964 ; 64.935,148.616 cw(c63.957,147.637) 65.34,147.637 ccw(c63.957,147.637) 64.935,148.616 ; 64.935,148.616 ccw(c65.913,149.594) 65.913,148.21 cw(c65.913,149.594) 64.935,148.616 ; 65.368,148.182 cw(c64.824,147.637) 65.594,147.637 ccw(c64.824,147.637) 65.368,148.182 ; 65.368,148.182 ccw(c65.913,148.727) 65.913,147.956 cw(c65.913,148.727) 65.368,148.182 ; 66.799,146.751 cw(c67.566,147.518) 66.485,147.596 ccw(c67.566,147.518) 66.799,146.751 ; 66.799,146.751 ccw(c66.032,145.984) 65.954,147.066 cw(c66.032,145.984) 66.799,146.751 ; 70.699,146.751 cw(c70.699,146.333) 70.995,146.629 ccw(c70.699,146.333) 70.699,146.751 ; 70.699,146.751 ccw(c70.699,147.169) 70.995,146.873 cw(c70.699,147.169) 70.699,146.751 ; 72.435,146.751 cw(c72.435,147.169) 72.139,146.873 ccw(c72.435,147.169) 72.435,146.751 ; 72.435,146.751 ccw(c72.435,146.333) 72.139,146.629 cw(c72.435,146.333) 72.435,146.751
CT3: CT3.1 D2.1 U2.10 Y7.3 | length 51.9
  Top Layer w0.254: Y7.3@62.483,150 62.483,149.226 64.516,147.193 64.516,146.685 CT3.1@65.913,145.288 66.614,144.587 D2.1@71.633,144.587 74.381,144.587 77.038,147.244 80.366,147.244 81.904,148.782 U2.10@84.634,148.782 ; 64.935,146.266 cw(c63.957,145.288) 65.34,145.288 ccw(c63.957,145.288) 64.935,146.266 ; 64.935,146.266 ccw(c65.913,147.244) 65.913,145.861 cw(c65.913,147.244) 64.935,146.266 ; 65.368,145.833 cw(c64.824,145.288) 65.594,145.288 ccw(c64.824,145.288) 65.368,145.833 ; 65.368,145.833 ccw(c65.913,146.377) 65.913,145.607 cw(c65.913,146.377) 65.368,145.833 ; 70.765,144.587 cw(c70.765,144.169) 71.061,144.465 ccw(c70.765,144.169) 70.765,144.587 ; 70.765,144.587 ccw(c70.765,145.005) 71.061,144.709 cw(c70.765,145.005) 70.765,144.587 ; 72.501,144.587 cw(c72.501,145.005) 72.205,144.709 ccw(c72.501,145.005) 72.501,144.587 ; 72.501,144.587 ccw(c72.501,144.169) 72.205,144.465 cw(c72.501,144.169) 72.501,144.587 ; Y7.3@62.356,150 ccw(c63.917,150) 62.813,148.896 cw(c63.917,150) Y7.3@62.356,150 ; Y7.3@62.61,150 ccw(c64.784,150) 63.246,148.463 cw(c64.784,150) Y7.3@62.61,150 ; Y7.3@62.864,150 ccw(c65.651,150) 63.68,148.029 cw(c65.651,150) Y7.3@62.864,150 ; Y7.3@63.118,150 ccw(c66.519,150) 64.114,147.595 cw(c66.519,150) Y7.3@63.118,150
DB0: U2.26 U10.10 | length 82.5
  Top Layer w0.254: U10.10@72.245,208.503 72.245,207.282 ; v3(79.49,158.777) 75.362,162.905 75.362,204.165 72.245,207.282 ; v3(90.336,145.722) 90.984,145.073 U2.26@90.984,143.932 ; 72.245,207.282 cw(c73.13,207.282) 72.611,207.999 ccw(c73.13,207.282) 72.245,207.282 ; 72.245,207.282 ccw(c71.36,207.282) 71.879,207.999 cw(c71.36,207.282) 72.245,207.282 ; 79.28,158.987 cw(c79.07,158.777) 79.367,158.777 ccw(c79.07,158.777) 79.28,158.987 ; 79.28,158.987 ccw(c79.49,159.197) 79.49,158.9 cw(c79.49,159.197) 79.28,158.987 ; 90.546,145.512 cw(c90.756,145.722) 90.459,145.722 ccw(c90.756,145.722) 90.546,145.512 ; 90.546,145.512 ccw(c90.336,145.302) 90.336,145.599 cw(c90.336,145.302) 90.546,145.512 ; 90.774,145.283 cw(c90.324,144.832) 90.961,144.832 ccw(c90.324,144.832) 90.774,145.283
  Bottom Layer w0.254: v3(79.49,158.777) 79.49,155.714 82.726,152.478 86.231,152.478 90.336,148.374 v3(90.336,145.722) ; 79.49,158.48 cw(c79.787,158.48) 79.577,158.69 ccw(c79.787,158.48) 79.49,158.48 ; 79.49,158.48 ccw(c79.193,158.48) 79.403,158.69 cw(c79.193,158.48) 79.49,158.48 ; 90.336,146.019 cw(c90.039,146.019) 90.249,145.809 ccw(c90.039,146.019) 90.336,146.019 ; 90.336,146.019 ccw(c90.633,146.019) 90.423,145.809 cw(c90.633,146.019) 90.336,146.019
DB1: U2.27 U10.9 | length 94.3
  Top Layer w0.254: U10.9@74.785,208.503 76.213,209.931 78.181,209.931 78.613,209.499 78.613,206.288 81.758,203.143 v3(81.758,152.273) ; U2.27@91.484,143.932 91.484,142.45 91.872,142.062 91.872,141.139 v3(91.885,141.125) ; 75.415,209.133 cw(c74.785,209.763) 74.785,208.872 ccw(c74.785,209.763) 75.415,209.133 ; 75.415,209.133 ccw(c76.045,208.503) 75.154,208.503 cw(c76.045,208.503) 75.415,209.133 ; 75.849,209.567 cw(c74.785,210.63) 74.785,209.126 ccw(c74.785,210.63) 75.849,209.567 ; 75.849,209.567 ccw(c76.912,208.503) 75.408,208.503 cw(c76.912,208.503) 75.849,209.567 ; 81.758,152.57 cw(c81.461,152.57) 81.671,152.36 ccw(c81.461,152.57) 81.758,152.57 ; 81.758,152.57 ccw(c82.055,152.57) 81.845,152.36 cw(c82.055,152.57) 81.758,152.57 ; v3@91.798,141.212 ccw(c91.62,141.39) 91.872,141.39 cw(c91.62,141.39) v3@91.798,141.212 ; 91.872,141.454 ccw(c92.214,141.454) 91.972,141.212 cw(c92.214,141.454) 91.872,141.454
  Bottom Layer w0.254: v3(81.758,152.273) 81.758,152.242 82.106,151.894 85.393,151.894 89.687,147.599 89.687,143.323 v3(91.885,141.125) ; 91.675,141.335 cw(c91.465,141.125) 91.762,141.125 ccw(c91.465,141.125) 91.675,141.335 ; 91.675,141.335 ccw(c91.885,141.545) 91.885,141.248 cw(c91.885,141.545) 91.675,141.335 ; v3@81.881,152.273 ccw(c82.253,152.273) 81.99,152.01 cw(c82.253,152.273) v3@81.881,152.273
DB2: U2.28 U10.8 | length 85
  Top Layer w0.201: v3@91.984,145.44 v3(91.987,145.442)
  Top Layer w0.254: U10.8@77.325,208.503 77.325,164.828 80.76,161.393 v3(80.76,157.126) ; U2.28@91.984,143.932 v3@91.984,145.44 ; 77.325,206.999 cw(c78.829,206.999) 77.766,208.063 ccw(c78.829,206.999) 77.325,206.999 ; 77.325,206.999 ccw(c75.821,206.999) 76.884,208.063 cw(c75.821,206.999) 77.325,206.999 ; 77.325,207.612 cw(c78.216,207.612) 77.586,208.242 ccw(c78.216,207.612) 77.325,207.612 ; 77.325,207.612 ccw(c76.434,207.612) 77.064,208.242 cw(c76.434,207.612) 77.325,207.612 ; 80.76,157.423 cw(c80.463,157.423) 80.673,157.213 ccw(c80.463,157.423) 80.76,157.423 ; 80.76,157.423 ccw(c81.057,157.423) 80.847,157.213 cw(c81.057,157.423) 80.76,157.423 ; v3@91.9,145.355 cw(c91.696,145.151) 91.984,145.151 ccw(c91.696,145.151) v3@91.9,145.355 ; 91.984,145.139 cw(c92.29,145.139) 92.074,145.355 ccw(c92.29,145.139) 91.984,145.139
  Bottom Layer w0.254: v3(80.76,157.126) 80.76,155.333 83.031,153.062 88.365,153.062 91.987,149.44 v3(91.987,145.442) ; 80.76,156.829 cw(c81.057,156.829) 80.847,157.039 ccw(c81.057,156.829) 80.76,156.829 ; 80.76,156.829 ccw(c80.463,156.829) 80.673,157.039 cw(c80.463,156.829) 80.76,156.829 ; 91.987,145.739 cw(c91.69,145.739) 91.9,145.529 ccw(c91.69,145.739) 91.987,145.739 ; 91.987,145.739 ccw(c92.284,145.739) 92.074,145.529 cw(c92.284,145.739) 91.987,145.739
DB3: U2.55 U10.7 | length 83
  Top Layer w0.254: U10.7@79.865,208.503 81.725,210.363 96.23,210.363 97.384,209.209 97.384,190.398 91.796,184.81 91.796,159.334 90.994,158.532 90.994,155.142 U2.55@90.984,155.132 ; 80.495,209.133 cw(c79.865,209.763) 79.865,208.872 ccw(c79.865,209.763) 80.495,209.133 ; 80.495,209.133 ccw(c81.125,208.503) 80.234,208.503 cw(c81.125,208.503) 80.495,209.133 ; 80.929,209.567 cw(c79.865,210.63) 79.865,209.126 ccw(c79.865,210.63) 80.929,209.567 ; 80.929,209.567 ccw(c81.992,208.503) 80.488,208.503 cw(c81.992,208.503) 80.929,209.567
DB4: U2.56 U10.6 | length 66.8
  Top Layer w0.254: U2.56@90.484,155.132 90.484,158.988 90.856,159.36 90.856,194.107 91.262,194.513 v3(91.262,199.619) ; 91.262,199.322 cw(c91.559,199.322) 91.349,199.532 ccw(c91.559,199.322) 91.262,199.322 ; 91.262,199.322 ccw(c90.965,199.322) 91.175,199.532 cw(c90.965,199.322) 91.262,199.322
  Bottom Layer w0.254: U10.6@82.405,208.503 91.262,199.646 v3(91.262,199.619) ; 83.035,207.873 cw(c83.665,208.503) 82.774,208.503 ccw(c83.665,208.503) 83.035,207.873 ; 83.035,207.873 ccw(c82.405,207.243) 82.405,208.134 cw(c82.405,207.243) 83.035,207.873 ; 83.469,207.44 cw(c84.532,208.503) 83.028,208.503 ccw(c84.532,208.503) 83.469,207.44 ; 83.469,207.44 ccw(c82.405,206.376) 82.405,207.88 cw(c82.405,206.376) 83.469,207.44 ; 91.033,199.875 cw(c90.776,199.619) 91.139,199.619 ccw(c90.776,199.619) 91.033,199.875 ; 91.099,199.809 ccw(c91.262,199.973) 91.262,199.742 cw(c91.262,199.973) 91.099,199.809
DB5: U2.57 U10.5 | length 81.2
  Top Layer w0.201: v3(89.984,153.723) U2.57@89.984,155.132 ; U2.57@89.984,154.084 cw(c89.623,154.084) 89.878,153.828 ccw(c89.623,154.084) U2.57@89.984,154.084 ; U2.57@89.984,154.084 ccw(c90.345,154.084) 90.09,153.828 cw(c90.345,154.084) U2.57@89.984,154.084
  Top Layer w0.254: U10.5@84.945,208.503 84.945,197.046 86.538,195.453 86.538,163.919 87.401,163.056 v3(87.401,158.42) ; 84.945,206.999 cw(c86.449,206.999) 85.386,208.063 ccw(c86.449,206.999) 84.945,206.999 ; 84.945,206.999 ccw(c83.441,206.999) 84.504,208.063 cw(c83.441,206.999) 84.945,206.999 ; 84.945,207.612 cw(c85.836,207.612) 85.206,208.242 ccw(c85.836,207.612) 84.945,207.612 ; 84.945,207.612 ccw(c84.054,207.612) 84.684,208.242 cw(c84.054,207.612) 84.945,207.612 ; 87.401,158.717 cw(c87.104,158.717) 87.314,158.507 ccw(c87.104,158.717) 87.401,158.717 ; 87.401,158.717 ccw(c87.698,158.717) 87.488,158.507 cw(c87.698,158.717) 87.401,158.717
  Bottom Layer w0.254: v3(87.401,158.42) 87.401,158.455 87.282,158.574 83.046,158.574 81.94,157.469 81.94,155.219 83.437,153.723 v3(89.984,153.723) ; 89.687,153.723 cw(c89.687,153.426) 89.897,153.636 ccw(c89.687,153.426) 89.687,153.723 ; 89.687,153.723 ccw(c89.687,154.02) 89.897,153.81 cw(c89.687,154.02) 89.687,153.723 ; 86.732,158.574 cw(c86.732,157.751) 87.314,158.333 ccw(c86.732,157.751) 86.732,158.574
DB6: U2.58 U10.4 | length 66.9
  Top Layer w0.254: U10.4@87.485,208.503 88.71,209.728 90.642,209.728 91.364,209.006 91.364,206.336 89.891,204.863 89.891,159.563 89.484,159.156 U2.58@89.484,155.132 ; 88.115,209.133 cw(c87.485,209.763) 87.485,208.872 ccw(c87.485,209.763) 88.115,209.133 ; 88.115,209.133 ccw(c88.745,208.503) 87.854,208.503 cw(c88.745,208.503) 88.115,209.133 ; 88.549,209.567 cw(c87.485,210.63) 87.485,209.126 ccw(c87.485,210.63) 88.549,209.567 ; 88.549,209.567 ccw(c89.612,208.503) 88.108,208.503 cw(c89.612,208.503) 88.549,209.567
DB7: U2.59 U10.3 | length 61.1
  Top Layer w0.201: U2.59@88.984,155.132 88.984,207.462
  Top Layer w0.254: U10.3@90.025,208.503 88.984,207.462 ; 88.984,207.462 cw(c89.994,206.453) 90.015,207.88 ccw(c89.994,206.453) 88.984,207.462 ; 88.984,207.462 ccw(c87.974,208.472) 89.402,208.494 cw(c87.974,208.472) 88.984,207.462 ; 89.408,207.887 cw(c90.006,207.289) 90.019,208.134 ccw(c90.006,207.289) 89.408,207.887 ; 89.408,207.887 ccw(c88.81,208.484) 89.656,208.497 cw(c88.81,208.484) 89.408,207.887
EEP_SCL: R1.1 R7.1 U1.6 | length 44.4
  Top Layer w0.254: R7.1@95.96,137.478 v1(96.926,137.478) ; v1(98.654,137.49) 98.666,137.478 102.883,137.478 105.296,139.891 U1.6@106.5,139.891 108.914,139.891 R1.1@109.474,140.451 ; R7.1@96.267,137.478 cw(c96.267,136.819) 96.733,137.285 ccw(c96.267,136.819) R7.1@96.267,137.478 ; R7.1@96.267,137.478 ccw(c96.267,138.137) 96.733,137.671 cw(c96.267,138.137) R7.1@96.267,137.478 ; v1(96.926,137.478) cw(c96.926,138.229) 96.334,137.768 ccw(c96.926,138.229) v1(96.926,137.478) ; v1(96.926,137.478) ccw(c96.926,136.727) 96.334,137.188 cw(c96.926,136.727) v1(96.926,137.478) ; 107.938,139.891 cw(c107.938,140.429) 107.558,140.049 ccw(c107.938,140.429) 107.938,139.891 ; 107.938,139.891 ccw(c107.938,139.353) 107.558,139.733 cw(c107.938,139.353) 107.938,139.891 ; v1@98.847,137.297 cw(c99.283,136.861) 99.283,137.478 ccw(c99.283,136.861) v1@98.847,137.297 ; v1@98.847,137.683 ccw(c99.342,138.179) 99.342,137.478 cw(c99.342,138.179) v1@98.847,137.683 ; 104.701,139.295 cw(c105.6,138.396) 105.6,139.668 ccw(c105.6,138.396) 104.701,139.295 ; 105.134,139.729 cw(c105.6,139.263) 105.6,139.922 ccw(c105.6,139.263) 105.134,139.729 ; U1.6@106.88,139.891 ccw(c106.88,142.945) 109.04,140.785 cw(c106.88,142.945) U1.6@106.88,139.891 ; U1.6@107.493,139.891 ccw(c107.493,142.332) 109.219,140.606 cw(c107.493,142.332) U1.6@107.493,139.891 ; 108.106,139.891 ccw(c108.106,141.719) 109.399,140.426 cw(c108.106,141.719) 108.106,139.891 ; 108.72,139.891 ccw(c108.72,141.105) 109.578,140.247 cw(c108.72,141.105) 108.72,139.891
  Bottom Layer w0.254: v1(96.926,137.478) 98.654,137.478 98.893,137.478 98.893,137.49 v1(98.654,137.49) ; 97.585,137.478 cw(c97.585,138.137) 97.119,137.671 ccw(c97.585,138.137) 97.585,137.478 ; 97.585,137.478 ccw(c97.585,136.819) 97.119,137.285 cw(c97.585,136.819) 97.585,137.478 ; 97.965,137.478 ccw(c97.965,138.179) 98.461,137.683 cw(c97.965,138.179) 97.965,137.478 ; 98.024,137.478 cw(c98.024,136.861) 98.461,137.297 ccw(c98.024,136.861) 98.024,137.478
EEP_SDA: R2.1 U1.5 U2.30 | length 37.8
  Top Layer w0.254: U2.30@92.984,143.932 92.984,138.791 93.088,138.687 97.101,138.687 97.815,137.973 97.815,136.982 98.247,136.55 102.972,136.55 105.042,138.621 U1.5@106.5,138.621 110.249,138.621 111.506,139.878 R2.1@111.506,140.451 ; 105.062,138.621 cw(c105.062,138.083) 105.442,138.463 ccw(c105.062,138.083) 105.062,138.621 ; 105.062,138.621 ccw(c105.062,139.159) 105.442,138.779 cw(c105.062,139.159) 105.062,138.621 ; 107.938,138.621 cw(c107.938,139.159) 107.558,138.779 ccw(c107.938,139.159) 107.938,138.621 ; 107.938,138.621 ccw(c107.938,138.083) 107.558,138.463 cw(c107.938,138.083) 107.938,138.621 ; 110.586,138.958 ccw(c109.588,139.956) 110.95,140.327 cw(c109.588,139.956) 110.586,138.958 ; 110.895,139.267 ccw(c110.074,140.088) 111.195,140.393 cw(c110.074,140.088) 110.895,139.267 ; 111.205,139.577 ccw(c110.561,140.221) 111.44,140.46 cw(c110.561,140.221) 111.205,139.577
EEP_WC: U1.7 U2.33 | length 18.7
  Top Layer w0.254: U2.33@95.834,145.782 v3(101.477,145.782) ; v3(104.28,142.978) 104.28,141.759 104.878,141.161 U1.7@106.5,141.161 ; 101.18,145.782 cw(c101.18,145.485) 101.39,145.695 ccw(c101.18,145.485) 101.18,145.782 ; 101.18,145.782 ccw(c101.18,146.079) 101.39,145.869 cw(c101.18,146.079) 101.18,145.782 ; 104.28,142.681 cw(c104.577,142.681) 104.367,142.891 ccw(c104.577,142.681) 104.28,142.681 ; 104.28,142.681 ccw(c103.983,142.681) 104.193,142.891 cw(c103.983,142.681) 104.28,142.681 ; 105.062,141.161 cw(c105.062,140.623) 105.442,141.003 ccw(c105.062,140.623) 105.062,141.161 ; 105.062,141.161 ccw(c105.062,141.699) 105.442,141.319 cw(c105.062,141.699) 105.062,141.161
  Bottom Layer w0.254: v3(101.477,145.782) v3(104.28,142.978) ; 101.686,145.572 cw(c101.896,145.782) 101.6,145.782 ccw(c101.896,145.782) 101.686,145.572 ; 101.686,145.572 ccw(c101.477,145.362) 101.477,145.659 cw(c101.477,145.362) 101.686,145.572 ; 104.07,143.188 cw(c103.86,142.978) 104.157,142.978 ccw(c103.86,142.978) 104.07,143.188 ; 104.07,143.188 ccw(c104.28,143.398) 104.28,143.101 cw(c104.28,143.398) 104.07,143.188